# EAGLE board patch_test (EAGLE 9.6.1)
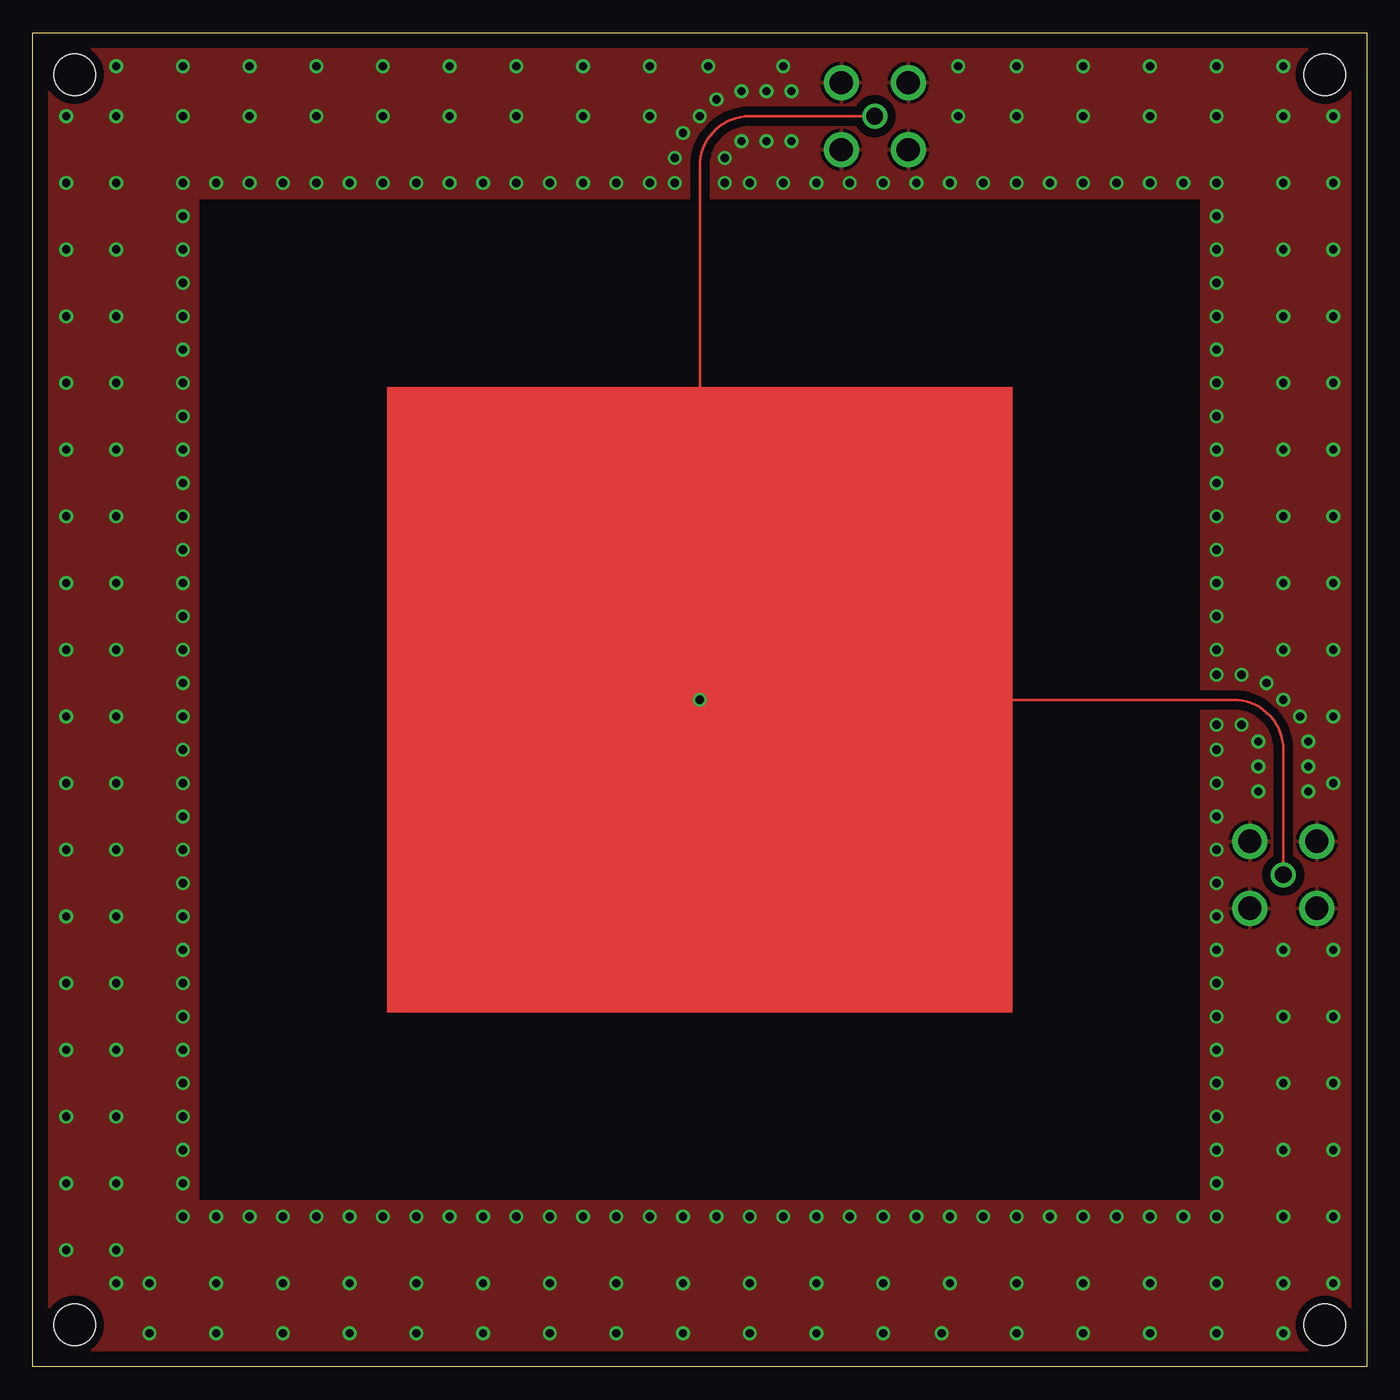
[diagram p0: board, top side]
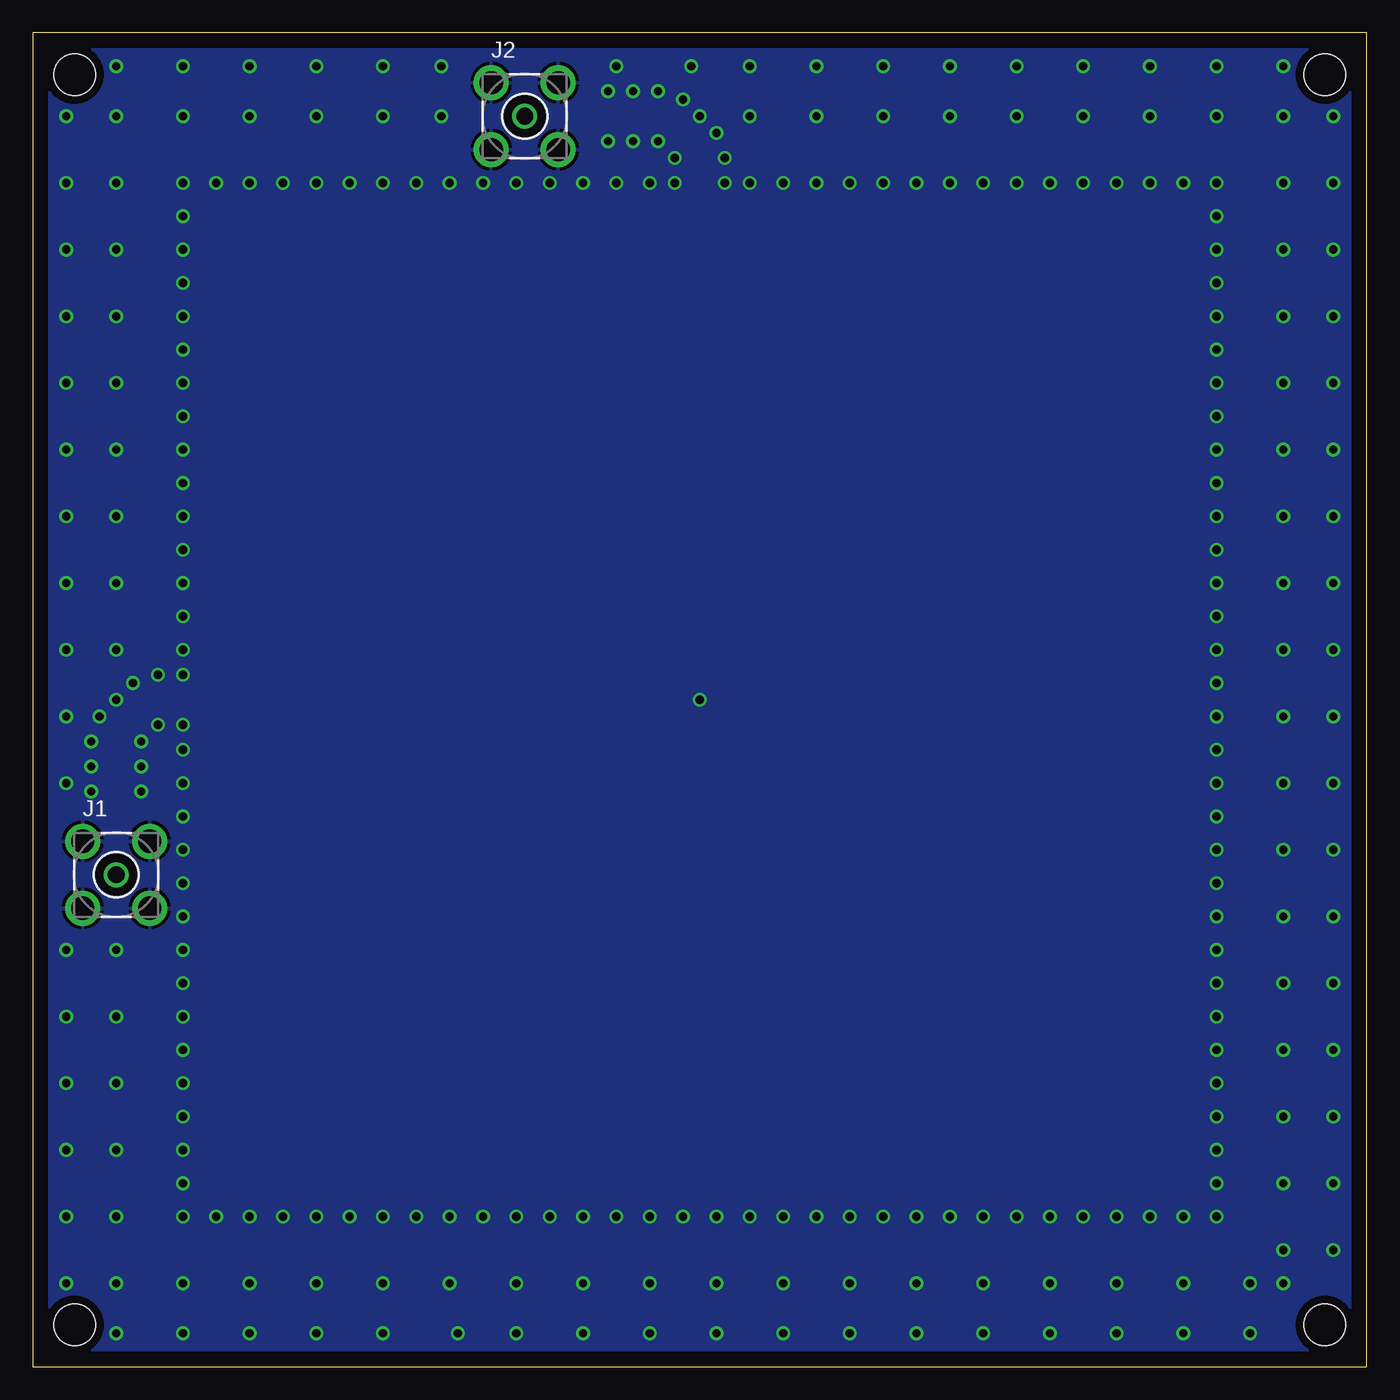
[diagram p1: board, bottom side, seen from below]

Size 101.6 x 101.6 mm. Coordinates in mm from the lower left corner, seen from the top.
Outline: 0,0 0,101.6 101.6,101.6 101.6,0 0,0
Copper layers (1*16): Top 0.035mm / dielectric 0.5mm / Bottom 0.035mm
Design rules "two_layer": minimum track width 5mil, minimum drill 10mil, track to track 5mil, track to pad 5mil, pad to pad 5mil, via to via 5mil, smd to smd 5mil, copper to edge 20mil, drill to drill 8mil, minimum pad ring 10mil, minimum via ring 8mil, stop-mask expansion 4mil, vias tented up to drill 0mil, thermal gap 10mil
Holes 3.17 mm at 3.17,98.42 98.42,98.42 3.17,3.17 98.42,3.17

## Footprints (pad centres in the part's own frame; a part is rotated, then mirrored left to right if it is on the bottom)
BU-SMA-V = drill 1.27: 1 0,0 | drill 1.778: 2 -2.55,2.55; 3 2.55,2.55; 4 2.55,-2.55; 5 -2.55,-2.55

## Placement (x,y rotation side)
J1  [BU-SMA-V]  95.25,37.47 0 bottom
J2  [BU-SMA-V]  64.14,95.25 0 bottom

## Library data of the parts
J1 J2 = con-coax

## Nets
GND: J1.2 J1.3 J1.4 J1.5 J2.2 J2.3 J2.4 J2.5
H: J1.1
V: J2.1

## Tracks (layer width: path | path; a pad name or v marks a point on that pad's centre or on a via)
GND  (via drill 0.64)
  other vias: 13.97,90.17 16.51,90.17 19.05,90.17 21.59,90.17 24.13,90.17 26.67,90.17 29.21,90.17 31.75,90.17 34.29,90.17 36.83,90.17 39.37,90.17 41.91,90.17 44.45,90.17 46.99,90.17 48.9,90.17 52.7,90.17 54.61,90.17 57.15,90.17 59.69,90.17 62.23,90.17 64.77,90.17 67.31,90.17 69.85,90.17 72.39,90.17 74.93,90.17 77.47,90.17 80.01,90.17 82.55,90.17 85.09,90.17 87.63,90.17 11.43,90.17 11.43,87.63 11.43,85.09 11.43,82.55 11.43,80.01 11.43,77.47 11.43,74.93 11.43,72.39 11.43,69.85 11.43,67.31 11.43,64.77 11.43,62.23 11.43,59.69 11.43,57.15 11.43,54.61 11.43,52.07 11.43,49.53 11.43,46.99 11.43,44.45 11.43,41.91 11.43,39.37 11.43,36.83 11.43,34.29 11.43,31.75 11.43,29.21 11.43,26.67 11.43,24.13 11.43,21.59 11.43,19.05 11.43,16.51 11.43,13.97 11.43,11.43 13.97,11.43 16.51,11.43 19.05,11.43 21.59,11.43 24.13,11.43 26.67,11.43 29.21,11.43 31.75,11.43 34.29,11.43 36.83,11.43 39.37,11.43 41.91,11.43 44.45,11.43 46.99,11.43 49.53,11.43 52.07,11.43 54.61,11.43 57.15,11.43 59.69,11.43 62.23,11.43 64.77,11.43 67.31,11.43 69.85,11.43 72.39,11.43 74.93,11.43 77.47,11.43 80.01,11.43 82.55,11.43 85.09,11.43 87.63,11.43 90.17,90.17 90.17,87.63 90.17,85.09 90.17,82.55 90.17,80.01 90.17,77.47 90.17,74.93 90.17,72.39 90.17,69.85 90.17,67.31 90.17,64.77 90.17,62.23 90.17,59.69 90.17,57.15 90.17,54.61 90.17,52.7 90.17,48.9 90.17,46.99 90.17,44.45 90.17,41.91 90.17,39.37 90.17,36.83 90.17,34.29 90.17,31.75 90.17,29.21 90.17,26.67 90.17,24.13 90.17,21.59 90.17,19.05 90.17,16.51 90.17,13.97 90.17,11.43 50.8,50.8 11.43,95.25 16.51,95.25 21.59,95.25 26.67,95.25 31.75,95.25 36.83,95.25 41.91,95.25 46.99,95.25 6.35,95.25 6.35,90.17 6.35,85.09 6.35,80.01 6.35,74.93 6.35,69.85 6.35,64.77 6.35,59.69 6.35,54.61 6.35,49.53 6.35,44.45 6.35,39.37 6.35,34.29 6.35,29.21 6.35,24.13 6.35,19.05 6.35,13.97 6.35,8.89 13.97,6.35 8.89,6.35 19.05,6.35 24.13,6.35 29.21,6.35 34.29,6.35 39.37,6.35 44.45,6.35 49.53,6.35 54.61,6.35 59.69,6.35 64.77,6.35 69.85,6.35 74.93,6.35 95.25,74.93 95.25,69.85 95.25,64.77 95.25,59.69 95.25,54.61 99.06,54.61 99.06,49.53 99.06,44.45 97.16,45.72 99.06,31.75 99.06,21.59 95.25,26.67 99.06,26.67 95.25,16.51 95.25,21.59 95.25,11.43 80.01,6.35 90.17,6.35 95.25,6.35 85.09,6.35 46.99,99.06 51.44,99.06 57.15,99.06 80.01,95.25 74.93,95.25 74.93,99.06 80.01,99.06 85.09,99.06 90.17,99.06 95.25,99.06 99.06,95.25 99.06,16.51 99.06,11.43 99.06,6.35 95.25,2.54 97.16,43.81 93.98,52.07 97.16,47.62 92.08,52.7 92.08,48.9 93.34,47.62 93.34,45.72 93.34,43.81 95.25,31.75 52.7,92.08 53.98,93.34 55.88,93.34 57.78,93.34 70.48,95.25 48.9,92.08 49.53,93.98 50.8,95.25 53.98,97.16 55.88,97.16 57.78,97.16 70.48,99.06 96.52,49.53 95.25,50.8 52.07,96.52 85.09,95.25 90.17,95.25 95.25,95.25 95.25,90.17 95.25,85.09 95.25,80.01 11.43,99.06 6.35,99.06 2.54,95.25 16.51,99.06 21.59,99.06 26.67,99.06 31.75,99.06 36.83,99.06 41.91,99.06 2.54,90.17 2.54,85.09 2.54,80.01 2.54,74.93 2.54,69.85 2.54,64.77 2.54,59.69 2.54,54.61 2.54,49.53 2.54,44.45 2.54,39.37 2.54,34.29 2.54,29.21 2.54,24.13 2.54,19.05 2.54,13.97 2.54,8.89 8.89,2.54 6.35,6.35 13.97,2.54 19.05,2.54 24.13,2.54 29.21,2.54 34.29,2.54 39.37,2.54 44.45,2.54 49.53,2.54 54.61,2.54 59.69,2.54 64.77,2.54 69.22,2.54 74.93,2.54 80.01,2.54 85.09,2.54 90.17,2.54 99.06,90.17 99.06,85.09 99.06,80.01 99.06,74.93 99.06,69.85 99.06,64.77 99.06,59.69
  pour Bottom (isolate 0.635): 1.27,100.33 100.33,100.33 100.33,1.27 1.27,1.27
  pour Top (isolate 0.635, rank 6): 1.27,100.33 100.33,100.33 100.33,1.27 1.27,1.27
  cutout Top (isolate 0.254, rank 6, no thermals): 12.7,12.7 12.7,88.9 88.9,88.9 88.9,12.7
H
  Top 0.203: 74.6,50.8 91.44,50.8 arc-90 95.25,46.99 J1.1
V
  Top 0.203: 50.8,74.6 50.8,91.44 arc-90 54.61,95.25 J2.1
(copper drawn outside any net)
  shapes: Top area x1